# Altium PCB BRK7360.PcbDoc (part 2 of 3)
Units mil, origin at the board's own origin, x right, y up, seen from the top; angles counter-clockwise.
Board outline 7086.61 x 3956.69 mil, 4 copper layers (L1-Top, L2-Plane-1, L3-Plane-2, L4-Bottom), stack 61.722 mil thick; 4 components, 249 nets, 395 pads, 441 vias.
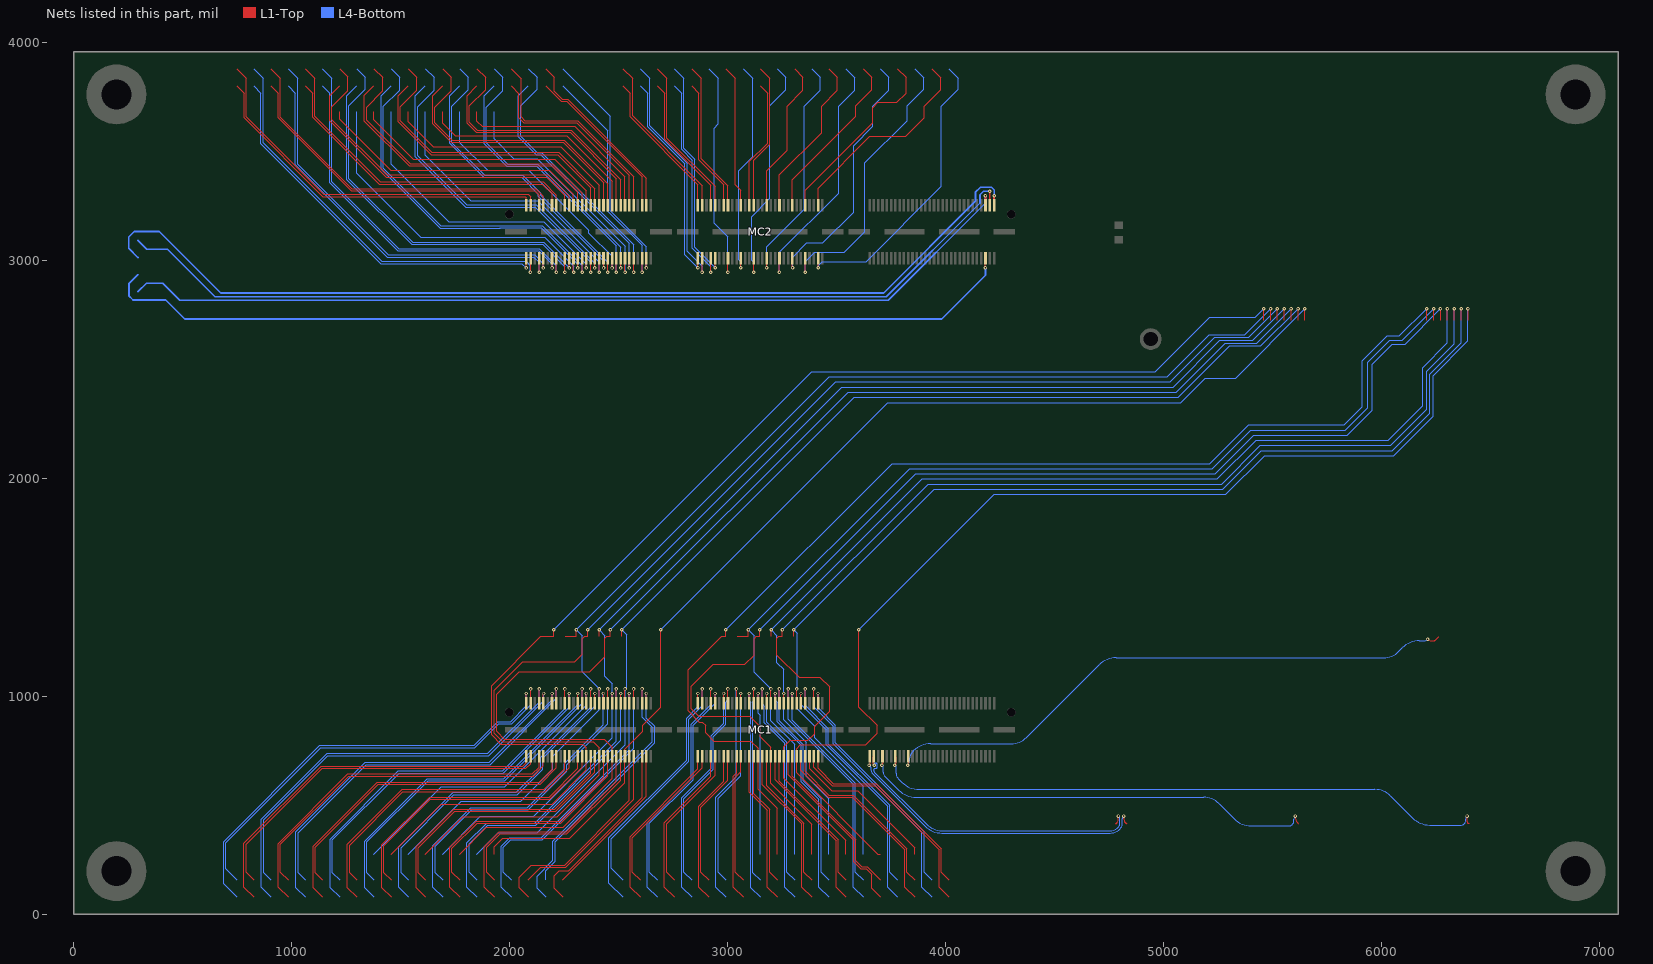
[diagram p4: the nets of this part, all layers, seen from the top]

## Via types
v1: diameter 16, hole 8, L1-Top to L4-Bottom, tented both sides, 441 vias

## Nets (pads, with @x,y where several pads share a name; then routed paths per layer and width w, separated by ;. In a path a pad name is that pad's centre, name@x,y a point inside that pad or via, vN(x,y) a via of type N, cw(c..) or ccw(c..) an arc to the next point about the centre after c; other vN are vias at no path point) (continued)
GTX116_TXN3: MC1.124 | length 1453.4
  L1-Top w5.24: 4784,415.62 ccw(c4762.27,437.35) 4793,437.35 v1(4793,450)
  L1-Top w5.25: MC1.124@3671.26,724.8 ccw(c3671.26,721.54) 3668,721.54 3668,688 ccw(c3673,688) v1(3673,683) ; 4780,415 4789,424
  L4-Bottom w5.24: v1(3673,683) 3673,687 cw(c3679,687) 3679,693 cw(c3679,685) 3687,685 3687,676 cw(c3679,676) 3679,668 3676,668 ccw(c3676,662) 3670,662 3670,659.58 ccw(c3681.06,659.58) 3673.24,651.76 3912.71,412.29 ccw(c3983.42,483) 3983.42,383 4754.37,383 ccw(c4754.37,437.63) 4793,399 ccw(c4776.1,415.9) 4800,415.9 4800,438 ccw(c4787.93,438) 4796.47,446.53 v1(4793,450)
GTX116_TXP0: MC1.140 | length 2722.5
  L1-Top w5.24: v1(3826,683) 3826.34,683.34 ccw(c3812.69,697) 3832,697 3832,716.94 ccw(c3820.87,716.94) MC1.140@3828.74,724.8 ; v1(6211,1261) ccw(c6226.43,1276.43) 6226.43,1254.61 6241,1254.61 ccw(c6241,1263.33) 6247.16,1257.16 6258.32,1268.32 cw(c6262.38,1264.26) 6262.38,1270
  L4-Bottom w5.24: v1(3826,683) ccw(c3807.22,701.78) 3833.78,701.78 3833.78,704 cw(c3895.7,704) 3851.92,747.78 3852.56,748.42 cw(c3931.2,669.78) 3931.2,781 4300.71,781 ccw(c4300.71,881) 4371.42,810.29 4704.56,1143.42 cw(c4783.2,1064.78) 4783.2,1176 6008.71,1176 ccw(c6008.71,1276) 6079.42,1205.29 6095.17,1221.03 cw(c6173.81,1142.39) 6173.81,1253.61 6193.16,1253.61 ccw(c6193.16,1278.84) v1(6211,1261)
GTX116_TXP1: MC1.134 | length 2862.8
  L1-Top w5.24: v1(3767,683) 3767.34,683.34 ccw(c3753.69,697) 3773,697 3773,716.8 ccw(c3761.68,716.8) MC1.134@3769.69,724.8 ; v1(6392,450) 6392,424.62 ccw(c6401,424.62) 6401,415.62
  L4-Bottom w5.24: v1(3767,683) cw(c3767,677.22) 3772.78,677.22 3772.78,647.31 ccw(c3811.31,647.31) 3784.07,620.07 3799.56,604.58 ccw(c3878.2,683.22) 3878.2,572 5969.71,572 cw(c5969.71,472) 6040.42,542.71 6141.78,441.36 ccw(c6220.42,520) 6220.42,408.78 6366,408.78 ccw(c6366,428.39) 6385.61,428.39 6385.61,434.57 cw(c6407.43,434.57) v1(6392,450)
GTX116_TXP2: MC1.128 | length 2132.9
  L1-Top w5.24: v1(3708,683) ccw(c3693.51,697.49) 3714,697.49 3714,716.67 ccw(c3702.5,716.67) MC1.128@3710.63,724.8 ; v1(5604,450) 5604,446.38 ccw(c5648.38,446.38) 5617,415
  L4-Bottom w5.24: v1(3708,683) cw(c3708,677.22) 3713.78,677.22 3713.78,651.36 ccw(c3740.36,651.36) 3721.57,632.57 3785.56,568.58 ccw(c3864.2,647.22) 3864.2,536 5183.71,536 cw(c5183.71,436) 5254.42,506.71 5323.78,437.36 ccw(c5402.42,516) 5402.42,404.78 5576.39,404.78 ccw(c5576.39,426) 5597.61,426 5597.61,434.57 cw(c5619.43,434.57) v1(5604,450)
GTX116_TXP3: MC1.122 | length 1454.1
  L1-Top w5.24: v1(4817,450) 4817,439.76 ccw(c4851.14,439.76) 4827,415.62
  L1-Top w5.25: v1(3649,683) ccw(c3649,689) 3655,689 3655,699 3651.58,699 MC1.122@3651.58,724.8 ; 4821,424 4830,415
  L4-Bottom w5.24: 3670.36,638.73 3904.73,404.36 ccw(c3983.38,483) 3983.38,371.78 4754.37,371.78 ccw(c4754.37,437.63) 4800.93,391.07 ccw(c4776.1,415.9) 4811.22,415.9 4811.22,438 cw(c4826.24,438) 4815.62,448.62 v1(4817,450)
  L4-Bottom w5.25: v1(3649,683) 3654.16,677.84 cw(c3650.32,674) 3655.75,674 ccw(c3705.63,674) 3670.36,638.73
JTAG_TCK: MC2.176 | length 4247.6
  L1-Top w5: v1(4183,2965) v1(4183,2965) MC2.176@4183.07,3008.27
  L4-Bottom w8: 295.28,2933.07 254,2891.8 254,2836 273,2817 423,2817 510,2730 3982,2730 4183,2931 v1(4183,2965)
JTAG_TDI: MC2.177 | length 4302.1
  L1-Top w8: MC2.177@4202.76,3251.58 4202.76,3315.76 v1(4203,3316)
  L4-Bottom w8: 295.28,3090.55 335.83,3050 431,3050 649,2832 3728,2832 4158,3262 4158,3300 4174,3316 v1(4203,3316)
JTAG_TDO: MC2.179 | length 4509.1
  L1-Top w8: MC2.179@4222.44,3251.58 4222.44,3294.44 v1(4223,3295)
  L4-Bottom w8: 295.28,3011.81 253,3054.09 253,3106 278,3131 393,3131 675,2849 3716,2849 4137,3270 4137,3311 4160,3334 4210.46,3334 4223,3321.46 v1(4223,3295)
JTAG_TMS: MC2.175 | length 4197.7
  L1-Top w8: v1(4183,3295) 4183.07,3294.93 MC2.175@4183.07,3251.58
  L4-Bottom w8: 295.28,2854.33 334.94,2894 410,2894 488,2816 3737,2816 4183,3262 v1(4183,3295)
MC1_B15_CLK_N: MC1.27 | length 1569.7
  L1-Top w5: MC1.27@2332.68,968.11 2332.68,1032.79 v1(2332.89,1033)
  L4-Bottom w5: 1377.95,157.48 1344.86,190.57 1344.86,330.86 1626,612 1978.14,612 2332.89,966.75 v1(2332.89,1033)
MC1_B15_CLK_P: MC1.25 | length 1606.4
  L1-Top w5: v1(2312.89,1012) 2312.99,1011.9 MC1.25@2312.99,968.11
  L4-Bottom w5: 1377.95,78.74 1334.86,121.83 1334.86,335 1621.86,622 1974,622 2312.89,960.89 v1(2312.89,1012)
MC1_B15_N0: MC1.3 | length 1989.5
  L1-Top w5: MC1.3@2096.46,968.11 2096.46,1032.57 v1(2096.89,1033)
  L4-Bottom w5: 748.03,157.48 698,207.51 698,328 1134,764 1841.14,764 1950.14,873 2009,873 2096.89,960.89 v1(2096.89,1033)
MC1_B15_N1: MC1.4 | length 1670.4
  L1-Top w5: 826.77,157.48 791.12,193.13 791.12,319.98 1140.14,669 2075,669 2096.46,690.46 MC1.4@2096.46,724.8
MC1_B15_N2: MC1.9 | length 1876.2
  L1-Top w5: MC1.9@2155.51,968.11 2155.51,1011.62 v1(2155.89,1012)
  L4-Bottom w5: 905.51,157.48 872.42,190.57 872.42,432.42 1167,727 1905,727 2155.89,977.89 v1(2155.89,1012)
MC1_B15_N3: MC1.10 | length 1577.6
  L1-Top w5: 984.25,157.48 948.6,193.13 948.6,319.46 1262.14,633 2108.14,633 2155.51,680.37 MC1.10@2155.51,724.8
MC1_B15_N4: MC1.15 | length 1778.4
  L1-Top w5: MC1.15@2214.57,968.11 2214.57,1032.68 v1(2214.89,1033)
  L4-Bottom w5: 1062.99,157.48 1029.9,190.57 1029.9,373.9 1342,686 1911,686 2214.89,989.89 v1(2214.89,1033)
MC1_B15_N5: MC1.16 | length 1474.4
  L1-Top w5: 1141.73,157.48 1108.64,190.57 1108.64,307.5 1397.14,596 2140.14,596 2214.57,670.43 MC1.16@2214.57,724.8
MC1_B15_N6: MC1.21 | length 1642.3
  L1-Top w5: MC1.21@2273.62,968.11 2273.62,1011.73 v1(2273.89,1012)
  L4-Bottom w5: 1220.47,157.48 1187.38,190.57 1187.38,340.38 1494,647 1972,647 2273.89,948.89 v1(2273.89,1012)
MC1_B15_N7: MC1.22 | length 1380.3
  L1-Top w5: 1299.21,157.48 1266.12,190.57 1266.12,316.98 1511.14,562 2163.14,562 2273.62,672.48 MC1.22@2273.62,724.8
MC1_B15_N8: MC1.28 | length 1278.7
  L1-Top w5: 1456.69,157.48 1423.6,190.57 1423.6,313.6 1637,527 2185.14,527 2332.68,674.54 MC1.28@2332.68,724.8
MC1_B15_N9: MC1.33 | length 1451
  L1-Top w5: MC1.33@2391.73,968.11 2391.73,1011.84 v1(2391.89,1012)
  L4-Bottom w5: 1535.43,157.48 1502.34,190.57 1502.34,305.2 1745.14,548 2036,548 2153,665 2153,715 2391.89,953.89 v1(2391.89,1012)
MC1_B15_N10: MC1.34 | length 1188.7
  L1-Top w5: 1614.17,157.48 1581.08,190.57 1581.08,305.08 1748,472 2212.14,472 2391.73,651.59 MC1.34@2391.73,724.8
MC1_B15_N11: MC1.39 | length 1433.6
  L1-Top w5: MC1.39@2450.79,968.11 2450.79,1032.9 v1(2450.89,1033)
  L4-Bottom w5: 1692.91,157.48 1659.82,190.57 1659.82,311.82 1827,479 2086.14,479 2262,654.86 2262,684.86 2450.89,873.75 v1(2450.89,1033)
MC1_B15_N12: MC1.40 | length 1102.6
  L1-Top w5: 1771.65,157.48 1736,193.13 1736,302 1851,417 2234.14,417 2450.79,633.65 MC1.40@2450.79,724.8
MC1_B15_N13: MC1.45 | length 1330
  L1-Top w5: MC1.45@2509.84,968.11 2509.84,1011.95 v1(2509.89,1012)
  L4-Bottom w5: 1850.39,157.48 1814.74,193.13 1814.74,322.6 1899.14,407 2119.14,407 2509.89,797.75 v1(2509.89,1012)
MC1_B15_N14: MC1.46 | length 1015.4
  L1-Top w5: 1929.13,157.48 1895,191.61 1895,305.86 1957.14,368 2263.14,368 2509.84,614.7 MC1.46@2509.84,724.8
MC1_B15_N15: MC1.51 | length 1286.1
  L1-Top w5: MC1.51@2568.9,968.11 v1(2568.89,1033)
  L4-Bottom w5: 2007.87,157.48 1972.22,193.13 1972.22,306.08 2006.14,340 2149.14,340 2568.89,759.75 v1(2568.89,1033)
MC1_B15_N16: MC1.52 | length 833.2
  L1-Top w5: 2086.61,157.48 2144.13,215 2257,215 2568.9,526.9 MC1.52@2568.9,724.8
MC1_B15_N17: MC1.57 | length 1120.8
  L1-Top w5: v1(2627.89,1012) 2627.95,1011.94 MC1.57@2627.95,968.11
  L4-Bottom w5: 2165.35,157.48 2165.35,199.21 2209,242.86 2209,330.86 2665,786.86 2665,861.14 2627.89,898.25 v1(2627.89,1012)
MC1_B15_N18: MC1.58 | length 726.3
  L1-Top w5: 2244.09,157.48 2627.95,541.34 MC1.58@2627.95,724.8
MC1_B15_P0: MC1.1 | length 2026.1
  L1-Top w5: MC1.1@2076.77,968.11 2076.77,1011.88 v1(2076.89,1012)
  L4-Bottom w5: 748.03,78.74 688,138.77 688,332.14 1129.86,774 1837,774 1946,883 2004.86,883 2076.89,955.03 v1(2076.89,1012)
MC1_B15_P1: MC1.2 | length 1743.5
  L1-Top w5: 826.77,78.74 781.12,124.39 781.12,324.12 1136,679 2061,679 2076.77,694.77 MC1.2@2076.77,724.8
MC1_B15_P2: MC1.7 | length 1997.2
  L1-Top w5: MC1.7@2135.83,968.11 2135.83,1032.94 v1(2135.89,1033)
  L4-Bottom w5: 905.51,78.74 862,122.25 862,436.14 1162.86,737 1900.86,737 2135.89,972.03 v1(2135.89,1033)
MC1_B15_P3: MC1.8 | length 1656.5
  L1-Top w5: 984.25,78.74 938.6,124.39 938.6,323.6 1258,643 2104,643 2135.83,674.83 MC1.8@2135.83,724.8
MC1_B15_P4: MC1.13 | length 1815
  L1-Top w5: MC1.13@2194.88,968.11 v1(2194.89,1012)
  L4-Bottom w5: 1062.99,78.74 1019.9,121.83 1019.9,378.04 1337.86,696 1906.86,696 2194.89,984.03 v1(2194.89,1012)
MC1_B15_P5: MC1.14 | length 1553.2
  L1-Top w5: 1141.73,78.74 1098.64,121.83 1098.64,311.64 1393,606 2136,606 2194.88,664.88 MC1.14@2194.88,724.8
MC1_B15_P6: MC1.19 | length 1762.9
  L1-Top w5: v1(2253.89,1033) 2253.94,1032.95 MC1.19@2253.94,968.11
  L4-Bottom w5: 1220.47,78.74 1177.38,121.83 1177.38,344.52 1489.86,657 1967.86,657 2253.89,943.03 v1(2253.89,1033)
MC1_B15_P7: MC1.20 | length 1459.2
  L1-Top w5: 1299.21,78.74 1256.12,121.83 1256.12,321.12 1507,572 2159,572 2253.94,666.94 MC1.20@2253.94,724.8
MC1_B15_P8: MC1.26 | length 1357.5
  L1-Top w5: 1456.69,78.74 1413.6,121.83 1413.6,317.74 1632.86,537 2181,537 2312.99,668.99 MC1.26@2312.99,724.8
MC1_B15_P9: MC1.31 | length 1572.9
  L1-Top w5: v1(2371.89,1033) 2372.05,1032.84 MC1.31@2372.05,968.11
  L4-Bottom w5: 1535.43,78.74 1491,123.17 1491,308 1741,558 2031.86,558 2143,669.14 2143,719.14 2371.89,948.03 v1(2371.89,1033)
MC1_B15_P10: MC1.32 | length 1267.6
  L1-Top w5: 1614.17,78.74 1571.08,121.83 1571.08,309.22 1743.86,482 2208,482 2372.05,646.05 MC1.32@2372.05,724.8
MC1_B15_P11: MC1.37 | length 1472.5
  L1-Top w5: v1(2430.89,1012) 2431.1,1011.79 MC1.37@2431.1,968.11
  L4-Bottom w5: 1692.91,78.74 1647.26,124.39 1647.26,313.41 1822.86,489 2082,489 2252,659 2252,689 2430.89,867.89 v1(2430.89,1012)
MC1_B15_P12: MC1.38 | length 1181.5
  L1-Top w5: 1771.65,78.74 1726,124.39 1726,306.15 1846.86,427 2230,427 2431.1,628.1 MC1.38@2431.1,724.8
MC1_B15_P13: MC1.43 | length 1450.8
  L1-Top w5: v1(2489.89,1033) 2490.16,1032.73 MC1.43@2490.16,968.11
  L4-Bottom w5: 1850.39,78.74 1804.74,124.39 1804.74,326.74 1895,417 2115,417 2489.89,791.89 v1(2489.89,1033)
MC1_B15_P14: MC1.44 | length 1095.5
  L1-Top w5: 1929.13,78.74 1883.48,124.39 1883.48,308.48 1953,378 2259,378 2490.16,609.16 MC1.44@2490.16,724.8
MC1_B15_P15: MC1.49 | length 1323
  L1-Top w5: v1(2548.89,1012) 2549.21,1011.68 MC1.49@2549.21,968.11
  L4-Bottom w5: 2007.87,78.74 1962.22,124.39 1962.22,310.22 2002,350 2145,350 2548.89,753.89 v1(2548.89,1012)
MC1_B15_P16: MC1.50 | length 963.2
  L1-Top w5: 2086.61,78.74 2043.52,121.83 2043.52,169 2099.52,225 2252.86,225 2549.21,521.36 MC1.50@2549.21,724.8
MC1_B15_P17: MC1.55 | length 1274.2
  L1-Top w5: v1(2607.89,1033) 2608.27,1032.62 MC1.55@2608.27,968.11
  L4-Bottom w5: 2165.35,78.74 2126,118.09 2126,174 2199,247 2199,335 2655,791 2655,857 2607.89,904.11 v1(2607.89,1033)
MC1_B15_P18: MC1.56 | length 854.2
  L1-Top w5: 2244.09,78.74 2205,117.83 2205,175 2228.07,198.07 2270.54,198.07 2608.27,535.8 MC1.56@2608.27,724.8
MC1_B15_X0: MC1.48 | length 5142.6
  L1-Top w5: 1929.13,275.59 1929.13,309.13 1969,349 2276,349 2529.53,602.53 MC1.48@2529.53,724.8 2529.53,755.53 2612,838 2612,867 2693,948 v1(2693,1304) ; v1(5648,2777) 5648.43,2776.57 5648.43,2724.41
  L4-Bottom w5: v1(2693,1304) 3735.46,2346.46 5078.46,2346.46 5191,2459 5330,2459 v1(5648,2777)
MC1_B15_X1: MC1.47 | length 5285.5
  L1-Top w5: 2515,1274.62 v1(2515,1304) ; MC1.47@2529.53,968.11 2529.53,1032.64 v1(2529.89,1033) ; 5616.93,2724.41 5616.93,2776.93 v1(5617,2777)
  L4-Bottom w5: 1850.39,275.59 1948.8,374 2127,374 2529.89,776.89 v1(2529.89,1033) 2537,1040.11 2537,1282 v1(2515,1304) 3581.08,2370.08 5068.08,2370.08 5304,2606 5446,2606 v1(5617,2777)
MC1_B15_X2: MC1.42 | length 6211.8
  L1-Top w5: 1771.65,275.59 1894.06,398 2246,398 2470.47,622.47 MC1.42@2470.47,724.8 2470.47,766.53 2433.85,803.15 1976.38,803.15 1940.94,838.58 1940.94,1007.87 2044.07,1111 2368,1111 2437,1180 2437,1265 2446.62,1274.62 2463,1274.62 v1(2463,1304) ; v1(5585,2777) 5585.43,2776.57 5585.43,2724.41
  L4-Bottom w5: v1(2463,1304) 3552.7,2393.7 5057.7,2393.7 5283,2619 5427,2619 v1(5585,2777)
MC1_B15_X3: MC1.41 | length 5398.6
  L1-Top w5: 2411,1274.62 v1(2411,1304) ; MC1.41@2470.47,968.11 2470.47,1011.58 v1(2470.89,1012) ; 5553.94,2724.41 5553.94,2776.94 v1(5554,2777)
  L4-Bottom w5: 1692.91,275.59 1866.32,449 2112,449 2470.89,807.89 v1(2470.89,1012) 2470.89,1056.11 2437,1090 2437,1278 v1(2411,1304) 3524.32,2417.32 5043.31,2417.32 5257.98,2632 5409,2632 v1(5554,2777)
MC1_B15_X4: MC1.36 | length 6206.7
  L1-Top w5: 1614.17,275.59 1785.58,447 2218,447 2411.42,640.42 MC1.36@2411.42,724.8 2411.42,763.58 2383.5,791.5 1968.34,791.5 1929.13,830.71 1929.13,1026.13 2061,1158 2299,1158 2333,1192 2333,1263 2344.62,1274.62 2359,1274.62 v1(2359,1304) ; v1(5522,2777) 5522.44,2776.56 5522.44,2724.41
  L4-Bottom w5: v1(2359,1304) 3495.94,2440.94 5031.5,2440.94 5235.55,2645 5390,2645 v1(5522,2777)
MC1_B15_X5: MC1.35 | length 5586.6
  L1-Top w5: 2255,1274.62 2307,1274.62 v1(2307,1304) ; MC1.35@2411.42,968.11 v1@2411.42,1032.47 ; 5490.94,2724.41 5490.94,2776.94 v1(5491,2777)
  L4-Bottom w5: 1535.43,275.59 1777.84,518 2051,518 2198,665 2198,725 2410.89,937.89 v1(2410.89,1033) 2333,1110.89 2333,1278 v1(2307,1304) 3467.57,2464.57 5015.75,2464.57 5209.18,2658 5372,2658 v1(5491,2777)
MC1_B15_X6: MC1.30 | length 6169.9
  L1-Top w5: 1456.69,275.59 1686.1,505 2196,505 2352.36,661.36 MC1.30@2352.36,724.8 2352.36,762.64 2335.47,779.53 1960.63,779.53 1917.32,822.83 1917.32,1048.32 2143.62,1274.62 2203,1274.62 v1(2203,1304) ; v1(5459,2777) 5459.45,2776.55 5459.45,2724.41
  L4-Bottom w5: v1(2203,1304) 3387.19,2488.19 4962.19,2488.19 5212,2738 5420,2738 v1(5459,2777)
MC1_B15_X7: MC1.29 | length 1355.8
  L1-Top w5: MC1.29@2352.36,968.11 2352.36,1011.47 v1(2352.89,1012)
  L4-Bottom w5: 1377.95,275.59 1686.36,584 1979,584 2352.89,957.89 v1(2352.89,1012)
MC1_B16_CLK_N: MC1.87 | length 955.7
  L1-Top w5: v1(3119.89,1033) 3120.08,1032.81 MC1.87@3120.08,968.11
  L4-Bottom w5: v1(3119.89,1033) 3119.89,977.89 3116.52,974.52 3116.52,853.96 3116.39,853.83 3116.39,840.17 3116.52,840.04 3116.52,190.57 3149.61,157.48
MC1_B16_CLK_P: MC1.85 | length 998.1
  L1-Top w5: v1(3099.89,1012) 3100.39,1011.5 MC1.85@3100.39,968.11
  L4-Bottom w5: v1(3099.89,1012) 3099.89,979.11 3106.52,972.48 3106.52,858.1 3106.39,857.98 3106.39,121.96 3149.61,78.74
MC1_B16_N0: MC1.63 | length 1135.8
  L1-Top w5: MC1.63@2883.86,968.11 v1@2883.86,1032.97
  L4-Bottom w5: 2519.69,157.48 2466,211.17 2466,346 2822,702 2822,894.86 2883.89,956.75 v1(2883.89,1033)
MC1_B16_N1: MC1.64 | length 715.1
  L1-Top w5: 2598.43,157.48 2562.78,193.13 2562.78,350.78 2883.86,671.86 MC1.64@2883.86,724.8
MC1_B16_N2: MC1.69 | length 1038.7
  L1-Top w5: MC1.69@2942.91,968.11 v1(2942.89,1012)
  L4-Bottom w5: 2677.17,157.48 2641.52,193.13 2641.52,416.04 2842.33,616.86 2842.33,866.19 2942.89,966.75 v1(2942.89,1012) v1@2943.39,1011.5
MC1_B16_N3: MC1.70 | length 674.3
  L1-Top w5: 2755.91,157.48 2720.26,193.13 2720.26,414.26 2942.91,636.91 MC1.70@2942.91,724.8
MC1_B16_N4: MC1.75 | length 1039.2
  L1-Top w5: v1(3001.89,1033) 3001.97,1032.92 MC1.75@3001.97,968.11
  L4-Bottom w5: 2834.65,157.48 2799,193.13 2799,529 2935,665 2935,813.86 2991.89,870.75 2991.89,972.89 3001.89,982.89 v1(3001.89,1033)
MC1_B16_N5: MC1.76 | length 633.3
  L1-Top w5: 2913.39,157.48 2878,192.87 2878,491 3001.97,614.97 MC1.76@3001.97,724.8
MC1_B16_N6: MC1.81 | length 956.5
  L1-Top w5: v1(3060.89,1012) 3061.02,1011.87 MC1.81@3061.02,968.11
  L4-Bottom w5: 2992.13,157.48 2956.48,193.13 2956.48,531.33 3060.89,635.75 v1(3060.89,1012)
MC1_B16_N7: MC1.82 | length 592.8
  L1-Top w5: MC1.82@3061.02,724.8 3061.02,653.88 3035.22,628.07 3035.22,193.13 3070.87,157.48
MC1_B16_N8: MC1.88 | length 612.2
  L1-Top w5: MC1.88@3120.08,724.8 3120.08,552.92 3192.7,480.3 3192.7,193.13 3228.35,157.48
MC1_B16_N9: MC1.93 | length 951.8
  L1-Top w5: v1(3178.89,1012) 3179.13,1011.76 MC1.93@3179.13,968.11
  L4-Bottom w5: v1(3178.89,1012) 3178.89,881.11 3186.5,873.5 3186.87,873.5 3271.44,788.93 3271.44,193.13 3307.09,157.48
MC1_B16_N10: MC1.94 | length 652.9
  L1-Top w5: MC1.94@3179.13,724.8 3179.13,588.87 3350.18,417.82 3350.18,193.13 3385.83,157.48
MC1_B16_N11: MC1.99 | length 1034.4
  L1-Top w5: v1(3237.89,1033) 3238.19,1032.7 MC1.99@3238.19,968.11
  L4-Bottom w5: v1(3237.89,1033) 3237.89,887.11 3347,778 3347,612 3428.92,530.08 3428.92,193.13 3464.57,157.48
MC1_B16_N12: MC1.100 | length 693.7
  L1-Top w5: MC1.100@3238.19,724.8 3238.19,609.81 3507.66,340.34 3507.66,193.13 3543.31,157.48
MC1_B16_N13: MC1.105 | length 1033.2
  L1-Top w5: v1(3296.89,1012) 3297.24,1011.65 MC1.105@3297.24,968.11
  L4-Bottom w5: v1(3296.89,1012) 3296.89,889.11 3586.4,599.6 3586.4,193.13 3622.05,157.48
MC1_B16_N14: MC1.106 | length 749.2
  L1-Top w5: MC1.106@3297.24,724.8 3297.24,632.76 3589,341 3589,289.38 3588.96,289.34 3588.96,244.19 3616.14,217 3641.27,217 3700.79,157.48
MC1_B16_N15: MC1.111 | length 1116.1
  L1-Top w5: v1(3355.89,1033) 3356.3,1032.59 MC1.111@3356.3,968.11
  L4-Bottom w5: v1(3355.89,1033) 3355.89,957.11 3462.86,850.14 3462.86,780.14 3743.88,499.12 3743.88,193.13 3779.53,157.48
MC1_B16_N16: MC1.112 | length 840.3
  L1-Top w5: MC1.112@3356.3,724.8 3356.3,654.7 3465,546 3576,546 3822.62,299.38 3822.62,193.13 3858.27,157.48
MC1_B16_N17: MC1.117 | length 1114.9
  L1-Top w5: v1(3414.89,1012) 3415.35,1011.53 MC1.117@3415.35,968.11
  L4-Bottom w5: v1(3414.89,1012) 3414.89,946.11 3494,867 3494,786 3901.36,378.64 3901.36,193.13 3937.01,157.48
MC1_B16_N18: MC1.118 | length 930.8
  L1-Top w5: MC1.118@3415.35,724.8 3415.35,668.79 3485.14,599 3681.14,599 3980.1,300.04 3980.1,193.13 4015.75,157.48
MC1_B16_P0: MC1.61 | length 1172.6
  L1-Top w5: v1(2863.89,1012) 2864.17,1011.72 MC1.61@2864.17,968.11
  L4-Bottom w5: 2519.69,78.74 2456,142.43 2456,350.14 2812,706.14 2812,899 2863.89,950.89 v1(2863.89,1012)
MC1_B16_P1: MC1.62 | length 794
  L1-Top w5: 2598.43,78.74 2552.78,124.39 2552.78,354.92 2864.17,666.32 MC1.62@2864.17,724.8
MC1_B16_P2: MC1.67 | length 1158.9
  L1-Top w5: v1(2922.89,1033) 2923.23,1032.66 MC1.67@2923.23,968.11
  L4-Bottom w5: 2677.17,78.74 2631.52,124.39 2631.52,420.18 2832.33,621 2832.33,870.33 2922.89,960.89 v1(2922.89,1033)
MC1_B16_P3: MC1.68 | length 753.2
  L1-Top w5: 2755.91,78.74 2710.26,124.39 2710.26,418.4 2923.23,631.37 MC1.68@2923.23,724.8
MC1_B16_P4: MC1.73 | length 1076.1
  L1-Top w5: v1(2981.89,1012) 2982.28,1011.61 MC1.73@2982.28,968.11
  L4-Bottom w5: 2834.65,78.74 2789,124.39 2789,533.14 2925,669.14 2925,818 2981.89,874.89 v1(2981.89,1012)
MC1_B16_P5: MC1.74 | length 712.2
  L1-Top w5: 2913.39,78.74 2868,124.13 2868,495.14 2982.28,609.43 MC1.74@2982.28,724.8
MC1_B16_P6: MC1.79 | length 1077.4
  L1-Top w5: v1(3040.89,1033) 3041.34,1032.55 MC1.79@3041.34,968.11
  L4-Bottom w5: 2992.13,78.74 2946.48,124.39 2946.48,535.48 3040.89,629.89 v1(3040.89,1033)
MC1_B16_P7: MC1.80 | length 671.7
  L1-Top w5: MC1.80@3041.34,724.8 3041.34,648.34 3025.22,632.22 3025.22,124.39 3070.87,78.74
MC1_B16_P8: MC1.86 | length 699.1
  L1-Top w5: MC1.86@3100.39,724.8 3100.39,558.46 3182.7,476.16 3182.7,124.39 3228.35,78.74
MC1_B16_P9: MC1.91 | length 1081.7
  L1-Top w5: v1(3158.89,1033) 3159.45,1032.44 MC1.91@3159.45,968.11
  L4-Bottom w5: v1@3159.39,1032.5 v1(3158.89,1033) 3158.89,964.11 3168.89,954.11 3168.89,876.97 3182.36,863.5 3182.72,863.5 3261.44,784.79 3261.44,124.39 3307.09,78.74
MC1_B16_P10: MC1.92 | length 739.8
  L1-Top w5: MC1.92@3159.45,724.8 3159.45,594.41 3340.18,413.68 3340.18,124.39 3385.83,78.74
MC1_B16_P11: MC1.97 | length 1079.1
  L1-Top w5: MC1.97@3218.5,968.11 3218.5,1011.61 v1(3218.89,1012)
  L4-Bottom w5: v1(3218.89,1012) 3218.89,981.11 3227.89,972.11 3227.89,882.97 3337,773.86 3337,607.86 3418.92,525.94 3418.92,124.39 3464.57,78.74
MC1_B16_P12: MC1.98 | length 780.6
  L1-Top w5: MC1.98@3218.5,724.8 3218.5,615.35 3497.66,336.2 3497.66,124.39 3543.31,78.74
MC1_B16_P13: MC1.103 | length 1161.8
  L1-Top w5: MC1.103@3277.56,968.11 3277.56,1032.67 v1(3277.89,1033)
  L4-Bottom w5: v1(3277.89,1033) 3277.89,893.97 3576.4,595.46 3576.4,124.39 3622.05,78.74
MC1_B16_P14: MC1.104 | length 836
  L1-Top w5: MC1.104@3277.56,724.8 3277.56,638.3 3578,337.86 3578,241 3612,207 3637,207 3661,183 3661,118.53 3700.79,78.74
MC1_B16_P15: MC1.109 | length 1160.6
  L1-Top w5: MC1.109@3336.61,968.11 3336.61,1011.73 v1(3336.89,1012)
  L4-Bottom w5: v1(3336.89,1012) 3336.89,961.97 3452.86,846 3452.86,776 3733.88,494.98 3733.88,124.39 3779.53,78.74
MC1_B16_P16: MC1.110 | length 927.2
  L1-Top w5: MC1.110@3336.61,724.8 3336.61,660.24 3460.86,536 3571.86,536 3812.62,295.24 3812.62,124.39 3858.27,78.74
MC1_B16_P17: MC1.115 | length 1243.4
  L1-Top w5: MC1.115@3395.67,968.11 3395.67,1032.78 v1(3395.89,1033)
  L4-Bottom w5: v1(3395.89,1033) 3395.89,950.97 3484,862.86 3484,781.86 3891.36,374.5 3891.36,124.39 3937.01,78.74
MC1_B16_P18: MC1.116 | length 1017.7
  L1-Top w5: MC1.116@3395.67,724.8 3395.67,674.33 3481,589 3677,589 3970.1,295.9 3970.1,124.39 4015.75,78.74
MC1_B16_X0: MC1.108 | length 5209.5
  L1-Top w5: v1(3602,1304) 3602,950 3686,866 3686,829 3633,776 3334,776 3316.93,758.93 MC1.108@3316.93,724.8 3316.93,648.07 3689.41,275.59 3700.79,275.59 ; v1(6396,2777) 6396.46,2776.54 6396.46,2724.41
  L4-Bottom w5: v1(3602,1304) 4223.2,1925.2 5286.2,1925.2 5463.36,2102.36 6055.36,2102.36 6236,2283 6236,2469 6396,2629 v1(6396,2777)
MC1_B16_X1: MC1.107 | length 5177.2
  L1-Top w5: 3304,1274.62 v1(3304,1304) ; v1(3316.89,1033) 3316.93,1032.96 MC1.107@3316.93,968.11 ; 6364.96,2724.41 6364.96,2776.96 v1(6365,2777)
  L4-Bottom w5: 3622.05,275.59 3622.05,585.95 3400,808 3400,862 3316.89,945.11 v1(3316.89,1033) 3319.5,1035.61 3319.5,1288.5 v1(3304,1304) 3948.82,1948.82 5271.82,1948.82 5448.98,2125.98 6049.98,2125.98 6221,2297 6221,2477 6365,2621 v1(6365,2777)
MC1_B16_X2: MC1.102 | length 5399.9
  L1-Top w5: v1(3252,1304) 3252,1274.62 3234.62,1274.62 3226,1266 3226,1188 3328,1086 3424,1086 3468,1042 3468,930 3400,862 3400,828 3369,797 3288,797 3257.87,766.87 MC1.102@3257.87,724.8 3257.87,624.13 3543.31,338.69 3543.31,275.59 ; v1(6333,2777) 6333.46,2776.54 6333.46,2724.41
  L4-Bottom w5: v1(3252,1304) 3920.44,1972.44 5266.44,1972.44 5443.61,2149.61 6042.61,2149.61 6208,2315 6208,2491 6333,2616 v1(6333,2777)
MC1_B16_X3: MC1.101 | length 5170.5
  L1-Top w5: 3200,1274.62 v1(3200,1304) ; MC1.101@3257.87,968.11 v1@3257.87,1011.98 ; 6301.97,2724.41 v1@6301.97,2776.97
  L4-Bottom w5: 3464.57,275.59 3464.57,529.43 3361,633 3361,788 3257.89,891.11 v1(3257.89,1012) 3257.89,1122.11 3226,1154 3226,1278 v1(3200,1304) 3892.06,1996.06 5247.06,1996.06 5424.23,2173.23 6030.23,2173.23 6188,2331 6188,2506 6302,2620 v1(6302,2777)
MC1_B16_X4: MC1.96 | length 5527.2
  L1-Top w5: v1(3148,1304) 3148,1274.62 3132.62,1274.62 3122,1264 3122,1188 3080,1146 2935,1146 2834,1045 2834,941 2867,908 3102,908 3150,860 3150,814 3198.82,765.18 MC1.96@3198.82,724.8 3198.82,600.18 3385.83,413.17 3385.83,275.59 ; v1(6270,2777) 6270.47,2776.53 6270.47,2724.41
  L4-Bottom w5: v1(3148,1304) 3863.69,2019.69 5236.69,2019.69 5413.85,2196.85 5842.85,2196.85 5958,2312 5958,2523 6050,2615 6108,2615 v1(6270,2777)
MC1_B16_X5: MC1.95 | length 5190.9
  L1-Top w5: 3044,1274.62 3096,1274.62 v1(3096,1304) ; MC1.95@3198.82,968.11 3198.82,1032.93 v1(3198.89,1033) ; 6238.98,2724.41 v1@6238.98,2776.98
  L4-Bottom w5: 3307.09,275.59 3307.09,779.91 3198.89,888.11 v1(3198.89,1033) 3122,1109.89 3122,1278 v1(3096,1304) 3835.31,2043.31 5222.31,2043.31 5399.47,2220.47 5834.47,2220.47 5936,2322 5936,2532 6037,2633 6095,2633 v1(6239,2777)
MC1_B16_X6: MC1.90 | length 5390.9
  L1-Top w5: v1(2992,1304) 2992,1274.62 2972.62,1274.62 2819,1121 2819,932 2870,881 2885,881 2900,866 2900,831 2937,794 3106,794 3139.76,760.24 MC1.90@3139.76,724.8 3139.76,573.24 3228.35,484.65 3228.35,275.59 ; v1(6207,2777) 6207.48,2776.52 6207.48,2724.41
  L4-Bottom w5: v1(2992,1304) 3754.93,2066.93 5212.93,2066.93 5390.09,2244.09 5829.09,2244.09 5912,2327 5912,2539 6025,2652 6082,2652 v1(6207,2777)
MC1_B16_X7: MC1.89 | length 784.4
  L1-Top w5: MC1.89@3139.76,968.11 3139.76,1011.87 v1(3139.89,1012)
  L4-Bottom w5: v1(3139.89,1012) 3139.89,922.11 3149.61,912.39 3149.61,275.59
MC1_VREF1: MC1.114 | length 718.7
  L1-Top w5: MC1.114@3375.98,724.8 3375.98,667.02 3478,565 3597,565 3858.27,303.73 3858.27,275.59
MC2_B12_CLK_N: MC2.27 | length 1465.6
  L1-Top w5: 1377.95,3877.95 1418,3837.91 1418,3776 1344,3702 1344,3642.14 1544.14,3442 2197,3442 2332.68,3306.32 MC2.27@2332.68,3251.58
MC2_B12_CLK_P: MC2.25 | length 1353.8
  L1-Top w5: 1377.95,3799.21 1334,3755.26 1334,3638 1540,3432 2192.86,3432 2312.99,3311.87 MC2.25@2312.99,3251.58
MC2_B12_N0: MC2.3 | length 1733.7
  L1-Top w5: 748.03,3877.95 792,3833.98 792,3657.14 1148.14,3301 2085.02,3301 2096.46,3289.56 MC2.3@2096.46,3251.58
MC2_B12_N1: MC2.4 | length 1912.4
  L1-Top w5: v1(2096,2944) 2096.46,2944.46 MC2.4@2096.46,3008.27
  L4-Bottom w5: 826.77,3877.95 869.86,3834.86 869.86,3537.28 1413.14,2994 2076,2994 2096,2974 v1(2096,2944)
MC2_B12_N2: MC2.9 | length 1638.2
  L1-Top w5: 905.51,3877.95 949,3834.46 949,3656.14 1277.14,3328 2120.48,3328 2155.51,3292.96 MC2.9@2155.51,3251.58
MC2_B12_N3: MC2.10 | length 1836.4
  L1-Top w5: v1(2155,2964) 2155.51,2964.51 MC2.10@2155.51,3008.27
  L4-Bottom w5: 984.25,3877.95 1027.34,3834.86 1027.34,3440.8 1444.14,3024 2115.14,3024 2155,2984.14 v1(2155,2964)
MC2_B12_N4: MC2.15 | length 1541
  L1-Top w5: 1062.99,3877.95 1107,3833.94 1107,3659.14 1407.14,3359 2154.14,3359 2214.57,3298.58 MC2.15@2214.57,3251.58
MC2_B12_N5: MC2.16 | length 1820.7
  L1-Top w5: MC2.16@2214.57,3008.27 2214.57,2944.43 v1(2215,2944)
  L4-Bottom w5: 1141.73,3877.95 1184.82,3834.86 1184.82,3359.32 1492.14,3052 2137,3052 2215,2974 v1(2215,2944)
MC2_B12_N6: MC2.21 | length 1555.1
  L1-Top w5: 1220.47,3877.95 1258,3840.43 1258,3776 1184.82,3702.82 1184.82,3644.32 1438.14,3391 2175.48,3391 2273.62,3292.85 MC2.21@2273.62,3251.58
MC2_B12_N7: MC2.22 | length 1776.6
  L1-Top w5: MC2.22@2273.62,3008.27 2273.62,2964.38 v1(2274,2964)
  L4-Bottom w5: 1299.21,3877.95 1339,3838.17 1339,3783 1263.56,3707.56 1263.56,3373.58 1555.14,3082 2156,3082 v1(2274,2964)
MC2_B12_N8: MC2.28 | length 1696.7
  L1-Top w5: MC2.28@2332.68,3008.27 2332.68,2944.32 v1(2333,2944)
  L4-Bottom w5: 1456.69,3877.95 1496,3838.65 1496,3780 1421.04,3705.04 1421.04,3421.1 1685.14,3157 1953.52,3157 1954.02,3157.5 2150.5,3157.5 2333,2975 v1(2333,2944)
MC2_B12_N9: MC2.33 | length 1383.6
  L1-Top w5: 1535.43,3877.95 1575,3838.39 1575,3779 1499.78,3703.78 1499.78,3638.36 1644.14,3494 2225,3494 2391.73,3327.27 MC2.33@2391.73,3251.58
MC2_B12_N10: MC2.34 | length 1530.2
  L1-Top w5: v1(2391,2964) 2391.73,2964.73 MC2.34@2391.73,3008.27
  L4-Bottom w5: 1614.17,3877.95 1654,3838.13 1654,3779 1578.52,3703.52 1578.52,3477.62 1803.14,3253 2123,3253 2391,2985 v1(2391,2964)
MC2_B12_N11: MC2.39 | length 1304.1
  L1-Top w5: 1692.91,3877.95 1733,3837.87 1733,3776 1657.26,3700.26 1657.26,3629.88 1737.14,3550 2251,3550 2450.79,3350.21 MC2.39@2450.79,3251.58
MC2_B12_N12: MC2.40 | length 1443.4
  L1-Top w5: MC2.40@2450.79,3008.27 2450.79,2944.21 v1(2451,2944)
  L4-Bottom w5: 1771.65,3877.95 1811,3838.61 1811,3781 1736,3706 1736,3539.14 1886.14,3389 2059.48,3389 2142.5,3305.98 2142.5,3297.64 2451,2989.14 v1(2451,2944)
MC2_B12_N13: MC2.45 | length 1212.6
  L1-Top w5: 1850.39,3877.95 1890,3838.35 1890,3781 1816,3707 1816,3632.14 1852.14,3596 2282,3596 2509.84,3368.16 MC2.45@2509.84,3251.58
MC2_B12_N14: MC2.46 | length 1342.2
  L1-Top w5: MC2.46@2509.84,3008.27 2509.84,2964.16 v1(2510,2964)
  L4-Bottom w5: 1929.13,3877.95 1969,3838.09 1969,3777 1893.48,3701.48 1893.48,3537.66 1991.14,3440 2129,3440 2510,3059 v1(2510,2964)
MC2_B12_N15: MC2.51 | length 1000.4
  L1-Top w5: 2007.87,3877.95 2053,3832.83 2053,3657.14 2070.14,3640 2312,3640 2568.9,3383.1 MC2.51@2568.9,3251.58
MC2_B12_N16: MC2.52 | length 1271.9
  L1-Top w5: MC2.52@2568.9,3008.27 2568.9,2944.1 v1(2569,2944)
  L4-Bottom w5: 2086.61,3877.95 2126,3838.57 2126,3783 2050.96,3707.96 2050.96,3569.18 2127.14,3493 2147,3493 2569,3071 v1(2569,2944)
MC2_B12_N17: MC2.57 | length 832.8
  L1-Top w5: 2165.35,3877.95 2205,3838.31 2205,3773.71 2240.71,3738 2266,3738 2627.95,3376.05 MC2.57@2627.95,3251.58
MC2_B12_N18: MC2.58 | length 1117.3
  L1-Top w5: MC2.58@2627.95,3008.27 v1@2627.95,2964.05 ; v1@2627.95,2964.05 v1(2628,2964)
  L4-Bottom w5: 2244.09,3877.95 2462,3660.05 2462,3227.14 2628,3061.14 v1(2628,2964)
MC2_B12_P0: MC2.1 | length 1641
  L1-Top w5: 748.03,3799.21 782,3765.24 782,3653 1144,3291 2071,3291 2076.77,3285.23 MC2.1@2076.77,3251.58
MC2_B12_P1: MC2.2 | length 1777
  L1-Top w5: MC2.2@2076.77,3008.27 2076.77,2964.23 v1(2077,2964)
  L4-Bottom w5: 826.77,3799.21 859.86,3766.12 859.86,3533.14 1409,2984 2057,2984 v1(2077,2964)
MC2_B12_P2: MC2.7 | length 1551.3
  L1-Top w5: 905.51,3799.21 939,3765.72 939,3652 1273,3318 2116.33,3318 2135.83,3298.51 MC2.7@2135.83,3251.58
MC2_B12_P3: MC2.8 | length 1789.7
  L1-Top w5: MC2.8@2135.83,3008.27 2135.83,2944.17 v1(2136,2944)
  L4-Bottom w5: 984.25,3799.21 1017.34,3766.12 1017.34,3436.66 1440,3014 2111,3014 2136,2989 v1(2136,2944)
MC2_B12_P4: MC2.13 | length 1454.1
  L1-Top w5: 1062.99,3799.21 1097,3765.2 1097,3655 1403,3349 2150,3349 2194.88,3304.12 MC2.13@2194.88,3251.58
MC2_B12_P5: MC2.14 | length 1693.6
  L1-Top w5: MC2.14@2194.88,3008.27 2194.88,2964.12 v1(2195,2964)
  L4-Bottom w5: 1141.73,3799.21 1174.82,3766.12 1174.82,3355.18 1488,3042 2132.86,3042 2195,2979.86 v1(2195,2964)
MC2_B12_P6: MC2.19 | length 1445.5
  L1-Top w5: 1220.47,3799.21 1174.82,3753.56 1174.82,3640.18 1434,3381 2171.33,3381 2253.94,3298.4 MC2.19@2253.94,3251.58
MC2_B12_P7: MC2.20 | length 1704.8
  L1-Top w5: MC2.20@2253.94,3008.27 2253.94,2944.06 v1(2254,2944)
  L4-Bottom w5: 1299.21,3799.21 1253.56,3753.56 1253.56,3369.44 1551,3072 2151.86,3072 2254,2969.86 v1(2254,2944)
MC2_B12_P8: MC2.26 | length 1545.3
  L1-Top w5: v1(2313,2964) MC2.26@2312.99,3008.27
  L4-Bottom w5: 1456.69,3799.21 1411.04,3753.56 1411.04,3416.96 1681,3147 1957.67,3147 1958.17,3147.5 2146.36,3147.5 2313,2980.86 v1(2313,2964)
MC2_B12_P9: MC2.31 | length 1272.3
  L1-Top w5: 1535.43,3799.21 1489.78,3753.56 1489.78,3634.22 1640,3484 2220.86,3484 2372.05,3332.81 MC2.31@2372.05,3251.58
MC2_B12_P10: MC2.32 | length 1458.6
  L1-Top w5: v1(2372,2944) v1(2372,2944) MC2.32@2372.05,3008.27
  L4-Bottom w5: 1614.17,3799.21 1568.52,3753.56 1568.52,3473.48 1799,3243 2118.86,3243 2372,2989.86 v1(2372,2944)
MC2_B12_P11: MC2.37 | length 1192.2
  L1-Top w5: 1692.91,3799.21 1647.26,3753.56 1647.26,3625.74 1733,3540 2246.86,3540 2431.1,3355.76 MC2.37@2431.1,3251.58
MC2_B12_P12: MC2.38 | length 1292
  L1-Top w5: v1(2431,2964) 2431.1,2964.1 MC2.38@2431.1,3008.27
  L4-Bottom w5: 1771.65,3799.21 1726,3753.56 1726,3535 1882,3379 2055.33,3379 2132.5,3301.83 2132.5,3293.5 2431,2995 v1(2431,2964)
MC2_B12_P13: MC2.43 | length 1101.2
  L1-Top w5: 1850.39,3799.21 1806,3754.82 1806,3628 1848,3586 2277.86,3586 2490.16,3373.7 MC2.43@2490.16,3251.58
MC2_B12_P14: MC2.44 | length 1270.4
  L1-Top w5: v1(2490,2944) 2490.16,2944.16 MC2.44@2490.16,3008.27
  L4-Bottom w5: 1929.13,3799.21 1883.48,3753.56 1883.48,3533.52 1987,3430 2124.86,3430 2490,3064.86 v1(2490,2944)
MC2_B12_P15: MC2.49 | length 913.5
  L1-Top w5: 2007.87,3799.21 2043,3764.09 2043,3653 2066,3630 2307.86,3630 2549.21,3388.65 MC2.49@2549.21,3251.58
MC2_B12_P16: MC2.50 | length 1120.5
  L1-Top w5: v1(2549,2964) 2549.21,2964.21 MC2.50@2549.21,3008.27
  L4-Bottom w5: 2086.61,3799.21 2040.96,3753.56 2040.96,3565.04 2123,3483 2142.86,3483 2549,3076.86 v1(2549,2964)
MC2_B12_P17: MC2.55 | length 745.9
  L1-Top w5: 2165.35,3799.21 2236.57,3728 2261.86,3728 2608.27,3381.59 MC2.55@2608.27,3251.58
MC2_B12_P18: MC2.56 | length 1070.3
  L1-Top w5: v1(2608,2944) 2608.27,2944.27 MC2.56@2608.27,3008.27
  L4-Bottom w5: 2244.09,3799.21 2450,3593.31 2450,3225 2608,3067 v1(2608,2944)
MC2_B12_X0: MC2.48 | length 1114.3
  L1-Top w5: MC2.48@2529.53,3008.27 2529.53,2944.47 v1(2530,2944)
  L4-Bottom w5: 1929.13,3681.1 1929.13,3555.87 2019,3466 2128,3466 2530,3064 v1(2530,2944)
MC2_B12_X1: MC2.47 | length 959.2
  L1-Top w5: 1850.39,3681.1 1850.39,3637.61 1874,3614 2298,3614 2529.53,3382.47 MC2.47@2529.53,3251.58
MC2_B12_X2: MC2.42 | length 1161.7
  L1-Top w5: v1(2470,2964) 2470.47,2964.47 MC2.42@2470.47,3008.27
  L4-Bottom w5: 1771.65,3681.1 1771.65,3538.35 1899,3411 2088.33,3411 2363.5,3135.83 2363.5,3124.17 2470,3017.67 v1(2470,2964)
MC2_B12_X3: MC2.41 | length 1051.5
  L1-Top w5: 1692.91,3681.1 1692.91,3627.09 1750,3570 2262,3570 2470.47,3361.53 MC2.41@2470.47,3251.58
MC2_B12_X4: MC2.36 | length 1311.4
  L1-Top w5: v1(2411,2944) 2411.42,2944.42 MC2.36@2411.42,3008.27
  L4-Bottom w5: 1614.17,3681.1 1614.17,3480.83 1823,3272 2130,3272 2411,2991 v1(2411,2944)
MC2_B12_X5: MC2.35 | length 1135.6
  L1-Top w5: 1535.43,3681.1 1535.43,3633.57 1649,3520 2235,3520 2411.42,3343.58 MC2.35@2411.42,3251.58
MC2_B12_X6: MC2.30 | length 1388.4
  L1-Top w5: v1(2352,2964) 2352.36,2964.36 MC2.30@2352.36,3008.27
  L4-Bottom w5: 1456.69,3681.1 1456.69,3440.31 1720,3177 2157,3177 2352,2982 v1(2352,2964)
MC2_B12_X7: MC2.29 | length 1213.9
  L1-Top w5: 1377.95,3681.1 1377.95,3643.05 1558,3463 2208,3463 2352.36,3318.64 MC2.29@2352.36,3251.58
MC2_B12_X8: MC2.24 | length 1546.4
  L1-Top w5: MC2.24@2293.31,3008.27 2293.31,2944.69 v1(2294,2944)
  L4-Bottom w5: 1299.21,3681.1 1299.21,3397.79 1593,3104 2161,3104 2294,2971 v1(2294,2944)
MC2_B12_X9: MC2.23 | length 1300.9
  L1-Top w5: 1220.47,3681.1 1220.47,3646.53 1454,3413 2183,3413 2293.31,3302.69 MC2.23@2293.31,3251.58
MC2_B32_CLK_N: MC2.87 | length 675.4
  L1-Top w5: MC2.87@3120.08,3251.58 3120.08,3457.94 3194,3531.86 3194,3833.56 3149.61,3877.95
MC2_B32_CLK_P: MC2.85 | length 596.5
  L1-Top w5: MC2.85@3100.39,3251.58 3100.39,3452.39 3184,3536 3184,3764.82 3149.61,3799.21
MC2_B32_N0: MC2.63 | length 777.2
  L1-Top w5: 2519.69,3877.95 2564,3833.64 2564,3661 2883.86,3341.14 MC2.63@2883.86,3251.58
MC2_B32_N1: MC2.64 | length 1116.5
  L1-Top w5: v1(2883,2944) 2883.86,2944.86 MC2.64@2883.86,3008.27
  L4-Bottom w5: 2598.43,3877.95 2643,3833.38 2643,3616.14 2814,3445.14 2814,3041 2883,2972 v1(2883,2944)
MC2_B32_N2: MC2.69 | length 736.5
  L1-Top w5: 2677.17,3877.95 2722,3833.12 2722,3559.14 2942.91,3338.23 MC2.69@2942.91,3251.58
MC2_B32_N3: MC2.70 | length 1033.8
  L1-Top w5: MC2.70@2942.91,3008.27 2942.91,2965.09 v1(2943,2965)
  L4-Bottom w5: 2755.91,3877.95 2800,3833.86 2800,3512.14 2849,3463.14 2849,3059 v1(2943,2965)
MC2_B32_N4: MC2.75 | length 695.7
  L1-Top w5: 2834.65,3877.95 2879,3833.6 2879,3464.14 3001.97,3341.17 MC2.75@3001.97,3251.58
MC2_B32_N5: MC2.76 | length 1051.5
  L1-Top w5: v1@3001.97,2944.03 MC2.76@3001.97,3008.27
  L4-Bottom w5: 2913.39,3877.95 2958,3833.34 2958,3624.86 2938,3604.86 2938,3170 3002,3106 v1(3002,2944)
MC2_B32_N6: MC2.81 | length 654.9
  L1-Top w5: 2992.13,3877.95 3036,3834.08 3036,3346.14 3061.02,3321.12 MC2.81@3061.02,3251.58
MC2_B32_N7: MC2.82 | length 1005.2
  L1-Top w5: v1(3061,2965) MC2.82@3061.02,3008.27
  L4-Bottom w5: v1(3061,2965) 3061,2992 3051,3002 3051,3410.86 3115,3474.86 3115,3833.82 3070.87,3877.95
MC2_B32_N8: MC2.88 | length 1083.4
  L1-Top w5: v1(3120,2944) 3120.08,2944.08 MC2.88@3120.08,3008.27
  L4-Bottom w5: v1(3120,2944) 3120,2991 3111,3000 3111,3199.86 3194,3282.86 3194,3708 3268,3782 3268,3838.3 3228.35,3877.95
MC2_B32_N9: MC2.93 | length 711.6
  L1-Top w5: MC2.93@3179.13,3251.58 3179.13,3410.99 3273,3504.86 3273,3706 3346,3779 3346,3839.04 3307.09,3877.95
MC2_B32_N10: MC2.94 | length 1074.4
  L1-Top w5: v1(3179,2965) 3179.13,2965.13 MC2.94@3179.13,3008.27
  L4-Bottom w5: v1(3179,2965) 3179,3062 3351,3234 3351,3705 3425,3779 3425,3838.78 3385.83,3877.95
MC2_B32_N11: MC2.99 | length 752.8
  L1-Top w5: MC2.99@3238.19,3251.58 3238.19,3391.05 3431,3583.86 3431,3705 3504,3778 3504,3838.52 3464.57,3877.95
MC2_B32_N12: MC2.100 | length 1158.5
  L1-Top w5: v1(3238,2944) 3238.19,2944.19 MC2.100@3238.19,3008.27
  L4-Bottom w5: v1(3238,2944) 3238,3035 3510,3307 3510,3705 3584,3779 3584,3837.26 3543.31,3877.95
MC2_B32_N13: MC2.105 | length 793.2
  L1-Top w5: MC2.105@3297.24,3251.58 3297.24,3368.1 3588,3658.86 3588,3708 3661,3781 3661,3839 3622.05,3877.95
MC2_B32_N14: MC2.106 | length 1199.2
  L1-Top w5: MC2.106@3297.24,3008.27 3297.24,2965.76 v1(3298,2965)
  L4-Bottom w5: v1(3298,2965) 3298,3014 3363,3079 3437,3079 3578,3220 3578,3525 3666,3613 3666,3705 3740,3779 3740,3838.74 3700.79,3877.95
MC2_B32_N15: MC2.111 | length 885.3
  L1-Top w5: MC2.111@3356.3,3251.58 3356.3,3320.16 3665.14,3629 3665.14,3699 3689.14,3723 3776,3723 3819,3766 3819,3838.48 3779.53,3877.95
MC2_B32_N16: MC2.112 | length 1319.8
  L1-Top w5: v1(3356,2944) 3356.3,2944.3 MC2.112@3356.3,3008.27
  L4-Bottom w5: v1(3356,2944) 3356,2993 3399,3036 3535,3036 3630,3131 3630,3445.86 3824,3639.86 3824,3709 3899,3784 3899,3837.22 3858.27,3877.95
MC2_B32_N17: MC2.117 | length 973.1
  L1-Top w5: MC2.117@3415.35,3251.58 3415.35,3330.35 3652,3567 3817,3567 3902,3652 3902,3706 3978,3782 3978,3836.96 3937.01,3877.95
MC2_B32_N18: MC2.118 | length 1359.1
  L1-Top w5: MC2.118@3415.35,3008.27 3415.35,2965.65 v1(3416,2965)
  L4-Bottom w5: v1(3416,2965) 3416,2975 3434,2993 3636,2993 3981,3338 3981,3705 4059,3783 4059,3834.7 4015.75,3877.95
MC2_B32_P0: MC2.61 | length 690.3
  L1-Top w5: 2519.69,3799.21 2554,3764.9 2554,3656.86 2864.17,3346.68 MC2.61@2864.17,3251.58
MC2_B32_P1: MC2.62 | length 987.6
  L1-Top w5: v1(2864,2965) 2864.17,2965.17 MC2.62@2864.17,3008.27
  L4-Bottom w5: 2598.43,3799.21 2633,3764.64 2633,3612 2804,3441 2804,3025 v1(2864,2965)
MC2_B32_P2: MC2.67 | length 649.6
  L1-Top w5: 2677.17,3799.21 2712,3764.38 2712,3555 2923.23,3343.77 MC2.67@2923.23,3251.58
MC2_B32_P3: MC2.68 | length 988.8
  L1-Top w5: v1(2923,2944) 2923.23,2944.23 MC2.68@2923.23,3008.27
  L4-Bottom w5: 2755.91,3799.21 2790,3765.12 2790,3508 2839,3459 2839,3054 2923,2970 v1(2923,2944)
MC2_B32_P4: MC2.73 | length 608.8
  L1-Top w5: 2834.65,3799.21 2869,3764.86 2869,3460 2982.28,3346.72 MC2.73@2982.28,3251.58